# Altium PCB hardware_tutorial_aguo.PcbDoc
Units mm, origin at the board's own origin, x right, y up, seen from the top; angles counter-clockwise.
Board outline 60 x 60 mm, 2 copper layers (Top Layer, Bottom Layer); 30 components, 42 nets, 138 pads, 8 vias.
Unrouted connection lines stored in the file: 14.
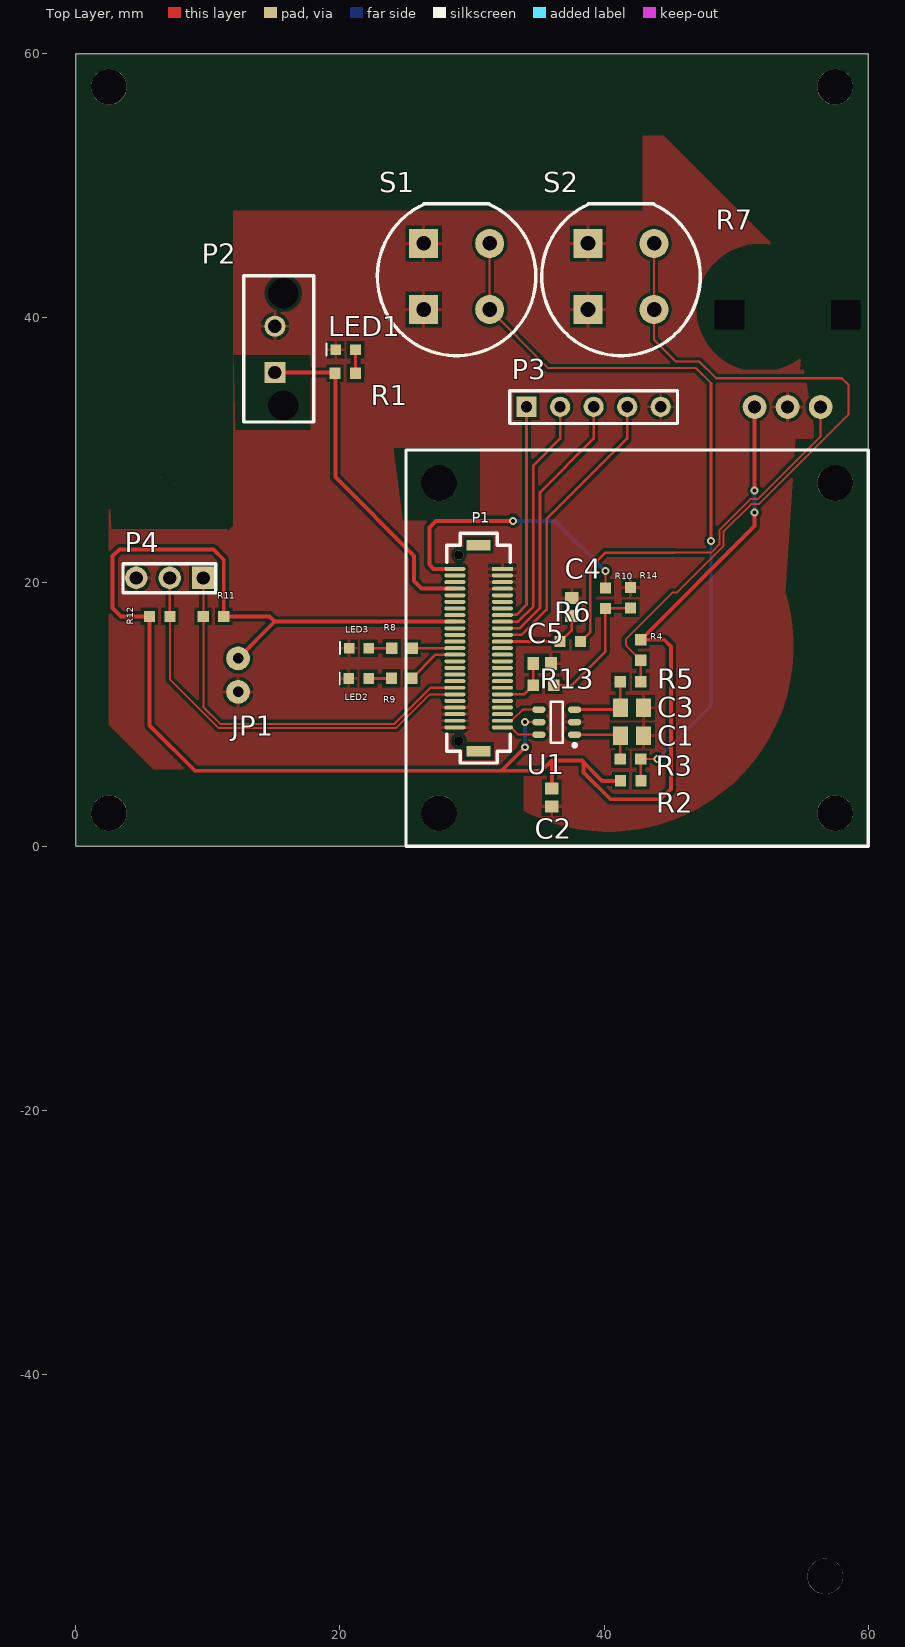
[diagram p0: Top Layer view]
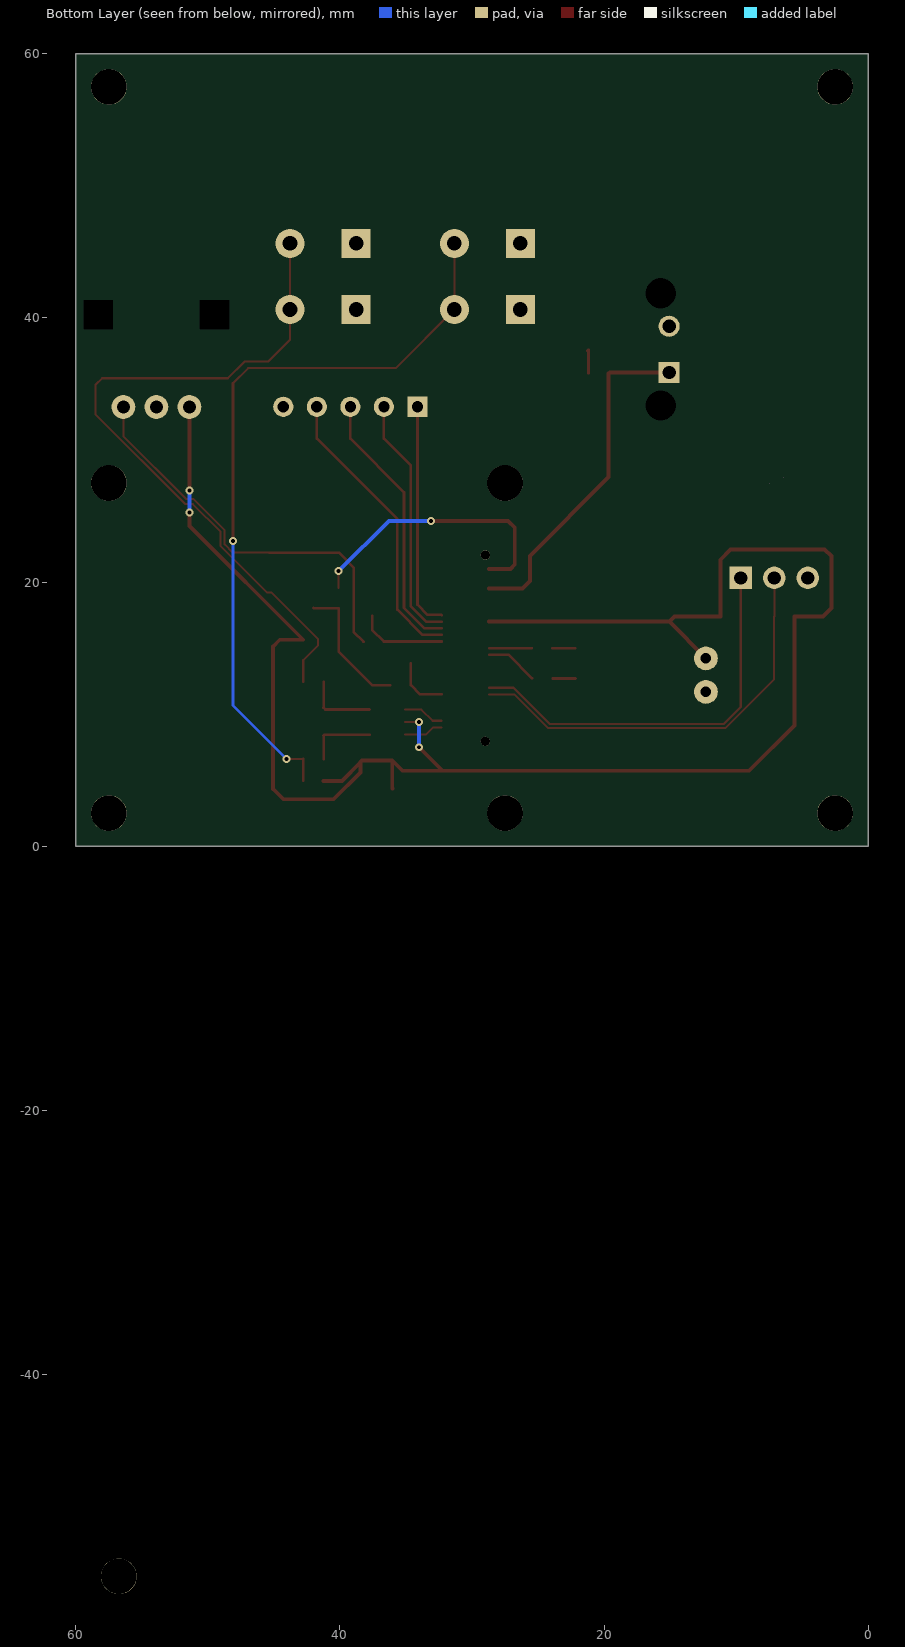
[diagram p1: Bottom Layer view, seen from below]
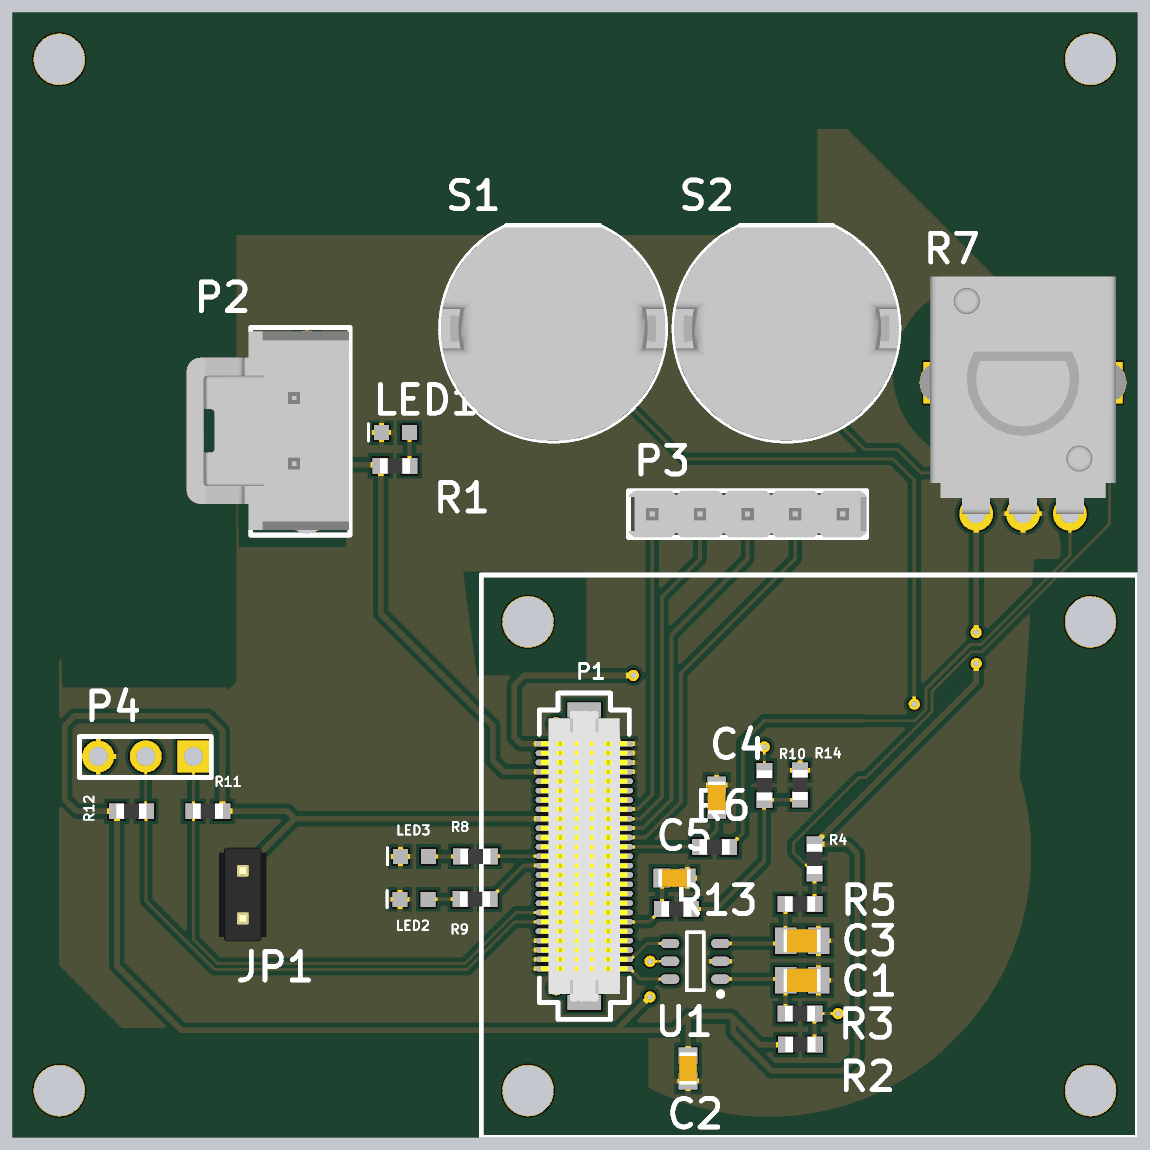
[diagram p2: 3D render of the assembled board from above, using the file's embedded part models]

## Layer stack, top to bottom
Top Solder: solder mask 0.0102, Solder Resist, Dk 3.5
Top Layer: signal copper 0.0356
Dielectric 1: dielectric 0.32, FR-4, Dk 4.8
Bottom Layer: signal copper 0.0356
Bottom Solder: solder mask 0.0102, Solder Resist, Dk 3.5

## Board outline
0,60 60,60 60,0 0,0
cut-out: 6.444,27.94
cut-out: 7.46,27.432
cut-out: 60.781,74.53

## Design rules (kind name [scope] priority, off if disabled: settings)
BoardOutlineClearance [All] p1: gap=0.406 ignorepadtopadclearanceinfootprint=FALSE
Clearance [All] p1: gap=0.254 ignorepadtopadclearanceinfootprint=FALSE except(0: Arc-Hole Track-Hole SMDPad-Hole THPad-Hole Via-Hole Fill-Hole Poly-Hole Region-Hole Text-Hole; 0.152: Arc-Arc Arc-Track Arc-SMDPad Track-Track Track-SMDPad SMDPad-SMDPad THPad-THPad)
ComponentClearance ComponentClearance_ControllerBoard [InComponent('P1') vs Identifier = 'Controller_Board'] p1: gap=0 collisioncheckmode=3 verticalgap=0 showdistances=FALSE
ComponentClearance ComponentClearance_Standoffs [Identifier = 'Standoff' vs Identifier = 'Controller_Board'] p2: gap=0 collisioncheckmode=3 verticalgap=0 showdistances=FALSE
ComponentClearance [All] p3: gap=0.254 collisioncheckmode=3 verticalgap=0.254 showdistances=FALSE
HoleSize [All] p1: absolutevalues=TRUE maxlimit=6.3 minlimit=0.3 maxpercent=80.000 minpercent=20.000
MinimumAnnularRing [All] p1: minimumring=0.152
MinimumSolderMaskSliver [All] p1: minsoldermaskwidth=0.3
PolygonConnect [IsPad] p1: connectstyle=Relief reliefconductorwidth=0.254 reliefentries=4 polygonreliefangle="90 Angle" airgapwidth=0.254
PolygonConnect PolygonConnect_NoThermal [Not(IsPad)] p2: connectstyle=Direct reliefconductorwidth=0.254 reliefentries=4 polygonreliefangle="90 Angle" airgapwidth=0.254
RoutingVias [All] p1: holewidth=0.3 width=0.6 viastyle="Through Hole" minholewidth=0.3 minwidth=0.6 maxholewidth=0.711 maxwidth=1.27
SilkToSolderMaskClearance [IsPad] p1: minsilkscreentomaskgap=0.178 clearancetoexposedcopper=TRUE
SolderMaskExpansion [All] p1: expansion=0.102
Width [All] p1: maxlimit=2.54 minlimit=0.154 preferedwidth=0.2
26 further rules are at their usual default settings.

## Components (designator, comment, footprint, x,y, rotation, side; value= is the part's Value field where it differs from the comment)
C1 "CAP CER 10uF 25V 10% X5R 0805" "CAP, 0805" 42.117,8.382 r0 top
C2 "CAP CER 0.1UF 50V 10% X7R 0603" "CAP, 0603" 36.035,3.683 r270 top
C3 "CAP CER 10uF 25V 10% X5R 0805" "CAP, 0805" 42.117,10.49 r0 top
C4 "CAP CER 4.7UF 25V 10% X5R 0603" "CAP, 0603" 37.559,18.121 r90 top
C5 "CAP CER 0.1UF 50V 10% X7R 0603" "CAP, 0603" 35.313,13.843 r0 top
JP1 "JUMPER" "CONN 2POS JUMPER 0.1\"" 12.286,14.224 r270 top
LED1 "LED GREEN CLEAR 2V 0603" LED_0603 21.127,37.602 r180 top
LED2 "LED YELLOW CLEAR 2.1V 0603" LED_0603 22.118,12.71 r180 top
LED3 "LED GREEN CLEAR 2V 0603" LED_0603 22.141,14.996 r180 top
P1 "CONN 50POS Bergstak Plug 0.02\"" "CONN, BERGSTAK 50 POS PLUG" 30.5,15 r0 top locked
P2 "CONN 2POS ULTRA-FIT 0.138\"" "CONN, 2POS ULTRA-FIT" 15.08,35.87 r90 top
P3 "5POS 0.1" "CONN, 5POS HEADR 0.1\"" 34.13,33.274 r0 top
P4 "CONN 3POS HEADR MALE 0.1\"" "CONN, 3POS 0.100\" Header, 1 ROW" 9.652,20.32 r180 top
R1 "RES 4.7K OHM 1% 1/10W 0603" "RES, 0603" 20.401,35.814 r0 top
R2 "RES 191K OHM 1% 1/10W 0603" "RES, 0603" 42.017,4.953 r0 top
R3 "RES 1.6K OHM 1% 1/10W 0603" "RES, 0603" 42.004,6.604 r180 top
R4 "RES 10K OHM 1% 1/10W 0603" "RES, 0603" 42.779,14.859 r270 top
R5 "RES 1.6K OHM 1% 1/10W 0603" "RES, 0603" 42.004,12.446 r180 top
R6 "1K" "RES, 0603" 37.445,15.494 r0 top
R7 "POT 10K OHM 1/20W CARBON LINEAR" "POT footprint (tutorial)" 53.897,33.259 r0 top
R8 "RES 100 OHM 1% 1/10W 0603" "RES, 0603" 24.694,14.996 r180 top
R9 "RES 100 OHM 1% 1/10W 0603" "RES, 0603" 24.671,12.71 r180 top
R10 "RES 10K OHM 1% 1/10W 0603" "RES, 0603" 40.099,18.783 r270 top
R11 "RES 10K OHM 1% 1/10W 0603" "RES, 0603" 10.427,17.399 r180 top
R12 "RES 10K OHM 1% 1/10W 0603" "RES, 0603" 6.35,17.399 r0 top
R13 "RES 10K OHM 1% 1/10W 0603" "RES, 0603" 35.413,12.192 r180 top
R14 "RES 3.3K OHM 1% 1/4W 0603" "RES, 0603" 42.004,18.809 r90 top
S1 "SPST" "SW SPST D6 SERIES GREEN" 26.336,45.64 r270 top
S2 "SPST" "SW SPST D6 SERIES YELLOW" 38.782,45.64 r270 top
U1 "IC INVERTER SCHMITT 2CH SC88" TSOP95P280X110-6N 36.416,9.398 r180 top

## Footprints (in the part's own frame and the unit in brackets; to place one, negate y for a bottom-side part, rotate by r counter-clockwise, add the part's x,y. Pads: shape width x height; smd on the part's side, far side on the other; paste and mask are expansions set on the pad)
"CAP, 0603" [mm] "Chip Capacitor, 2-Leads, Body 1.60x0.81mm, IPC Medium Density"
  rect 0.9x1 smd mask+0.076: 1(-0.675,0) 2(0.675,0)
  body extent -0.87,-0.48 0.87,0.48, height 0.9
"CAP, 0805" [mm] "Chip Capacitor, 2-Leads, Body 2.00x1.25mm, IPC Medium Density"
  rect 1.15x1.4 smd: 1(-0.875,0) 2(0.875,0)
  body extent -1,-0.63 1,0.63, height 1.25
"CONN 2POS JUMPER 0.1\"" [mm]
  round 1.8 hole 0.8: 1(0,0) 2(2.54,0)
  body extent -1.23,-1.27 3.77,1.27, height 7.1
"CONN, 2POS ULTRA-FIT" [mm] "2 Positions Header, Shrouded Connector 0.138\" (3.50mm) Through Hole Gold"
  rect 1.6x1.6 hole 1.02: 1(0,0)
  round 1.6 hole 1.02: 2(3.5,0)
  round 1.6 hole 2.3: ""(-2.5,-0.63) ""(6,-0.63)
  silkscreen extent -3.74,-2.93 7.33,2.37, body extent -3.48,-2.87 7.12,5.79, height 13.85
"CONN, 3POS 0.100\" Header, 1 ROW" [mm] "Connector, 3 position 0.1\" (2.54mm) Through Hole Generic Header"
  rect 1.7x1.7 hole 1: 1(0,0)
  round 1.7 hole 1: 2(2.54,0) 3(5.08,0)
  silkscreen extent -0.95,-1.06 6.08,1.12
"CONN, 5POS HEADR 0.1\"" [mil]
  rect 60x60 hole 33.46: 1(0,0)
  round 60 hole 33.46: 2(100,0) 3(200,0) 4(300,0) 5(400,0)
  silkscreen extent -50,-50 450,48, body extent -50,-50 450,48, height 335
"CONN, BERGSTAK 50 POS PLUG" [mm] "Bergstak 50 Position Plug"
  rect 1.6x0.3 smd: 1(1.8,6)
  oval 1.6x0.3 smd: 2(1.8,5.5) 3(1.8,5) 4(1.8,4.5) 5(1.8,4) 6(1.8,3.5) 7(1.8,3) 8(1.8,2.5) 9(1.8,2) 10(1.8,1.5) 11(1.8,1) 12(1.8,0.5) 13(1.8,0) 14(1.8,-0.5) 15(1.8,-1) 16(1.8,-1.5) 17(1.8,-2) 18(1.8,-2.5) 19(1.8,-3) 20(1.8,-3.5) 21(1.8,-4) 22(1.8,-4.5) 23(1.8,-5) 24(1.8,-5.5) 25(1.8,-6) 26(-1.8,-6) 27(-1.8,-5.5) 28(-1.8,-5) 29(-1.8,-4.5) 30(-1.8,-4) 31(-1.8,-3.5) 32(-1.8,-3) 33(-1.8,-2.5) 34(-1.8,-2) 35(-1.8,-1.5) 36(-1.8,-1) 37(-1.8,-0.5) 38(-1.8,0) 39(-1.8,0.5) 40(-1.8,1) 41(-1.8,1.5) 42(-1.8,2) 43(-1.8,2.5) 44(-1.8,3) 45(-1.8,3.5) 46(-1.8,4) 47(-1.8,4.5) 48(-1.8,5) 49(-1.8,5.5) 50(-1.8,6)
  round 0.7 hole 0.7: ""(-1.5,-7.05) ""(-1.5,7.05)
  rect 1.8x0.8 smd: ""(0,-7.8) ""(0,7.8)
  silkscreen extent -2.4,-8.7 2.4,8.7, body extent -2.3,-7.75 2.3,7.75, height 4.2
LED_0603 [mm]
  rect 0.8x0.8 smd: 1(-0.05,0.01) 2(1.45,0.01)
  silkscreen extent 2.13,-0.46 2.13,0.45, body extent -0.09,-0.39 1.51,0.41, height 0.8
"POT footprint (tutorial)" [mm] "ape"
  round 1.8 hole 1: 1(-2.5,0) 2(2.5,0) 3(0,0)
  rect 1.82x2.22 hole 2.2 square: 4(-4.4,7) 4(4.4,7) 4(4.4,7)
  body extent -5.7,0 5.7,12.65, height 14.5
"RES, 0603" [mm] "Chip Resistor, 2-Leads, Body 1.60x0.80mm, IPC Medium Density"
  rect 0.85x0.85 smd: 1(-0.775,0) 2(0.775,0)
  body extent -0.8,-0.4 0.8,0.4, height 0.55
"SW SPST D6 SERIES GREEN" [mm]
  rect 2.2x2.2 hole 1.1: 1(0,0) 1(5,0)
  round 2.2 hole 1.1: 2(0,5) 2(5,5)
  silkscreen extent -3,-3.5 8.5,8.5, body extent -2.9,-3.5 8.5,8.5, height 6.17
"SW SPST D6 SERIES YELLOW" [mm]
  rect 2.2x2.2 hole 1.1: 1(0,0) 1(5,0)
  round 2.2 hole 1.1: 2(0,5) 2(5,5)
  silkscreen extent -3,-3.5 8.5,8.5, body extent -2.9,-3.5 8.5,8.5, height 6.17
TSOP95P280X110-6N [mm] "TSOP, 6-Leads, Body 2.90x1.50mm, Pitch 0.95mm, IPC Medium Density"
  oval 1x0.5 smd: 1(-1.35,0.95) 2(-1.35,0) 3(-1.35,-0.95) 4(1.35,-0.95) 5(1.35,0) 6(1.35,0.95)
  silkscreen extent -1.48,-1.55 0.45,1.87, body extent -0.85,-1.55 0.85,1.55, height 1.1

## Part data
C1 C3: "10µF ±10% 25V Ceramic Capacitor X5R 0805 (2012 Metric)", Capacitance=10µF, Manufacturer="Murata Electronics North America", Manufacturer Part Number=GRM21BR61E106KA73L, Operating Temperature="-55°C ~ 85°C", Package / Case="0805 (2012 Metric)", Ratings=-, Supplier Part Number 1=490-5523-1-ND, Temperature Coefficient=X5R, Tolerance=±10%, Voltage - Rated=25V, Applications="General Purpose", Category=Capacitors, ComponentLink1Description=http://search.murata.co.jp/Ceramy/image/img/A01X/G101/ENG/GRM21BR61E106KA73-01.pdf, ComponentLink1URL=http://search.murata.co.jp/Ceramy/image/img/A01X/G101/ENG/GRM21BR61E106KA73-01.pdf, Features=-, Height - Seated (Max)=-, Lead Spacing=-, Lead Style=-, Mounting Type="Surface Mount, MLCC", Packaging="Cut Tape (CT)", Part Status=Active, Pricing 1="1=0.3, 10=0.214, 100=0.1008, 500=0.07068, 1000=0.05851 (CAD)", RoHS="RoHS Compliant", Size / Dimension="0.079\" L x 0.049\" W (2.00mm x 1.25mm)", Stock 1=1695157, Supplier 1=Digi-Key, Thickness (Max)="0.053\" (1.35mm)"
C2 C5: "0.10µF ±10% 50V Ceramic Capacitor X7R 0603 (1608 Metric)", Capacitance=0.1µF, Manufacturer 1="AVX Corporation", Manufacturer Part Number 1=06035C104KAT2A, Operating Temperature="-55°C ~ 125°C", Package / Case="0603 (1608 Metric)", Ratings=-, Supplier Part Number 1=478-5052-1-ND, Temperature Coefficient=X7R, Tolerance=±10%, Voltage=50V, ComponentLink1Description=http://datasheets.avx.com/X7RDielectric.pdf, ComponentLink1URL=http://datasheets.avx.com/X7RDielectric.pdf, Height - Seated (Max)=-, Lead Spacing=-, Lead Style=-, Mounting Type="Surface Mount, MLCC", Packaging="Cut Tape (CT)", Part Status=Active, Size / Dimension="0.063\" L x 0.032\" W (1.60mm x 0.81mm)", Supplier 1=Digi-Key, Thickness (Max)="0.035\" (0.90mm)"
C4: "4.7µF ±10% 25V Ceramic Capacitor X5R 0603 (1608 Metric)", Capacitance=4.7µF, Manufacturer 1="Murata Electronics North America", Manufacturer Part Number 1=GRM188R61E475KE11D, Operating Temperature="-55°C ~ 85°C", Package / Case="0603 (1608 Metric)", Ratings=-, Supplier Part Number 1=490-7203-1-ND, Temperature Coefficient=X5R, Tolerance=±10%, Voltage=25V, ComponentLink1Description=http://www.murata.com/~/media/webrenewal/support/library/catalog/products/capacitor/mlcc/c02e.ashx, ComponentLink1URL=http://www.murata.com/~/media/webrenewal/support/library/catalog/products/capacitor/mlcc/c02e.ashx, Height - Seated (Max)=-, Lead Spacing=-, Lead Style=-, Mounting Type="Surface Mount, MLCC", Packaging="Cut Tape (CT)", Part Status=Active, Size / Dimension="0.063\" L x 0.031\" W (1.60mm x 0.80mm)", Supplier 1=Digi-Key, Thickness (Max)="0.031\" (0.80mm)"
JP1: library part "CONN 2POS JUMPER 0.1\"", "2 Positions Header Connector Through Hole Gold", Current Rating=2A, Insulation Color=Black, Manufacturer="Omron Electronics Inc-EMC Div", Manufacturer Part Number=XG8T-0231, Material Flammability Rating="UL94 V-0", Operating Temperature="-55°C ~ 105°C", Supplier Part Number 1=XG8T-0231-ND, Voltage Rating=300V, Applications=-, Category="Connectors, Interconnects", ComponentLink1Description=http://www.omron.com/ecb/products/pdf/en-xj8.pdf, ComponentLink1URL=http://www.omron.com/ecb/products/pdf/en-xj8.pdf, Connector Type=Header, Contact Finish - Mating=Gold, Contact Finish - Post=Tin, Contact Finish Thickness - Mating="5.9µin (0.15µm)", Contact Finish Thickness - Post=-, Contact Length - Mating="0.169\" (4.30mm)", Contact Length - Post="0.118\" (3.00mm)", Contact Material="Brass, Nickel", Contact Shape=Square, Contact Type="Male Pin", Fastening Type=-, Features=-, Ingress Protection=-, Insulation Height="0.098\" (2.50mm)", Insulation Material="Polybutylene Terephthalate (PBT), Glass Filled", Mated Stacking Heights=-, Mounting Type="Through Hole", Number of Positions=2, Number of Positions Loaded=All, Number of Rows=2, Overall Contact Length="0.386\" (9.80mm)", Packaging=Bulk, Part Status=Active, Pitch - Mating=-, Pricing 1="1=0.28, 10=0.265, 100=0.183, 500=0.15484, 1000=0.12668, 5000=0.11261, 10000=0.10205 (CAD)", RoHS="RoHS Compliant", Row Spacing - Mating="0.100\"", Shrouding=Unshrouded, Stock 1=9094, Style="Board to Board or Cable", Supplier 1=Digi-Key, Termination=Solder, Type=JUMPER
LED1 LED3: "Green 572nm LED Indication - Discrete 2V 0603 (1608 Metric)", Color=Green, Current - Test=20mA, Lens Color=Colorless, Manufacturer="Wurth Electronics Inc.", Manufacturer Part Number=150060VS75000, Millicandela Rating=40mcd, Package / Case="0603 (1608 Metric)", Supplier Device Package=0603, Supplier Part Number 1=732-4980-1-ND, Voltage - Forward (Vf) (Typ)=2V, Category=Optoelectronics, ComponentLink1Description=http://katalog.we-online.de/led/datasheet/150060VS75000.pdf, ComponentLink1URL=http://katalog.we-online.de/led/datasheet/150060VS75000.pdf, Features=-, Height (Max)=0.80mm, Lens Style/Size="Rectangle with Flat Top, 1.10mm x 0.70mm", Lens Transparency=Clear, Mounting Type="Surface Mount", Packaging="Cut Tape (CT)", Part Status=Active, Pricing 1="1=0.21, 100=0.1617, 500=0.13964 (CAD)", RoHS="RoHS Compliant", Size / Dimension="1.60mm L x 0.80mm W", Stock 1=9408, Supplier 1=Digi-Key, Viewing Angle=140°, Wavelength - Dominant=570nm, Wavelength - Peak=572nm
LED2: "Yellow 590nm LED Indication - Discrete 2V 0603 (1608 Metric)", Color=Yellow, Current - Test=20mA, Lens Color=Colorless, Manufacturer="Wurth Electronics Inc.", Manufacturer Part Number=150060YS75000, Millicandela Rating=120mcd, Package / Case="0603 (1608 Metric)", Supplier Device Package=0603, Supplier Part Number 1=732-4981-1-ND, Voltage - Forward (Vf) (Typ)=2V, Category=Optoelectronics, ComponentLink1Description=http://katalog.we-online.de/led/datasheet/150060YS75000.pdf, ComponentLink1URL=http://katalog.we-online.de/led/datasheet/150060YS75000.pdf, Features=-, Height (Max)=0.80mm, Lens Style/Size="Rectangle with Flat Top, 1.10mm x 0.70mm", Lens Transparency=Clear, Mounting Type="Surface Mount", Packaging="Cut Tape (CT)", Part Status=Active, Pricing 1="1=0.21, 100=0.1617, 500=0.13964 (CAD)", RoHS="RoHS Compliant", Size / Dimension="1.60mm L x 0.80mm W", Stock 1=10523, Supplier 1=Digi-Key, Viewing Angle=140°, Wavelength - Dominant=590nm, Wavelength - Peak=595nm
P1: "50 Position Connector Plug, Outer Shroud Contacts Surface Mount Gold", Manufacturer 1="Amphenol FCI", Manufacturer Part Number 1=10132797-055100LF, Supplier Part Number 1=609-5226-1-ND, ComponentLink1Description=http://portal.fciconnect.com/Comergent//fci/drawing/10132797.pdf, ComponentLink1URL=http://portal.fciconnect.com/Comergent//fci/drawing/10132797.pdf, Connector Type="Plug, Outer Shroud Contacts", Contact Finish=Gold, Contact Finish Thickness="1µin (0.025µm)", Height Above Board="0.169\" (4.30mm)", Mated Stacking Heights=5mm, Mounting Type="Surface Mount", Number of Positions=50, Number of Rows=2, Packaging="Cut Tape (CT)", Part Status=Active, Pitch="0.020\" (0.50mm)", Series="BergStak Plug", Supplier 1=Digi-Key
P2: "Connector Header Through Hole 2 position 0.138\" (3.50mm)", Color=Black, Manufacturer=Molex, Manufacturer Part Number=1722871102, Supplier Part Number 1=WM11701-ND, ComponentLink1Description=http://www.molex.com/pdm_docs/sd/1722861302_sd.pdf, ComponentLink1URL=http://www.molex.com/pdm_docs/sd/1722861302_sd.pdf, Connector Type="Male Pin", Contact Plating=Tin, Fastening Type=Latch, Mount="Through Hole", Number of Positions=2, Number of Rows=1, Packaging=Tray, Pitch=0.138inch, Pricing 1="1 = 0.78000, 10 = 0.68800, 100 = 0.59380, 500 = 0.48582, 1000 = 0.43184, 5000 = 0.37786, 10000 = 0.35897 (USD)", RoHS=Yes, Series=UltraFit, Stock 1=2743, Supplier 1=Digi-Key, Termination=Solder
P3: library part "CONN 5POS HEADR MALE 0.1in", "5 Positions Header, Breakaway Connector 0.100\" (2.54mm) Through Hole Tin", Colour=Black, Contact Resistance=20mR, Manufacturer 1=Molex, Manufacturer Part Number 1=0022284050, Max Operating Temperature=75°C, Max Voltage Rating (AC)=250V, Min Operating Temperature=0°C, Supplier Part Number 1=WM50014-05-ND, ComponentLink1Description=https://datasheet.ciiva.com/6814/022284363-sd-6814049.pdf, ComponentLink1URL=https://datasheet.ciiva.com/6814/022284363-sd-6814049.pdf, ComponentLink2Description=https://datasheet.ciiva.com/14804/179390022284050-pcb-headers-14804361.pdf, ComponentLink2URL=https://datasheet.ciiva.com/14804/179390022284050-pcb-headers-14804361.pdf, ComponentLink3Description=https://datasheet.ciiva.com/15217/getdatasheetpartid-256138-15217709.pdf, ComponentLink3URL=https://datasheet.ciiva.com/15217/getdatasheetpartid-256138-15217709.pdf, Connector Type="Male Pin", Contact Material=Bronze,Brass, Contact Mating Length=0.24inch, Contact Plating=Nickel,Tin, Depth=2.49mm, Description 1="Conn Unshrouded Header HDR 5 POS 2.54mm Solder ST Thru-Hole KK® Bag", Gender=Male, Housing Colour=Black, Housing Material=Nylon, Length=12.7mm, Max Voltage Rating (DC)=250V, Mount="Through Hole", Number of Contacts=5, Number of Positions=5, Number of Rows=1, Orientation=Straight, Packaging=Bulk, Pitch=2.54mm, Pricing 1="1=0.22, 10=0.21, 25=0.1796, 50=0.157, 100=0.1459, 250=0.129, 500=0.1234 (USD)", Stock 1=3161, Supplier 1=Digi-Key, Termination=Solder
P4: "3 Positions Header Connector 0.100\" (2.54mm) Through Hole Gold", Current Rating=3A, Insulation Color=Black, Manufacturer 1="Wurth Electronics Inc.", Manufacturer Part Number 1=61300311121, Material Flammability Rating="UL94 V-0", Operating Temperature="-40°C ~ 125°C", Supplier Part Number 1=732-5316-ND, Voltage=250V, ComponentLink1Description=http://katalog.we-online.de/em/datasheet/6130xx11121.pdf, ComponentLink1URL=http://katalog.we-online.de/em/datasheet/6130xx11121.pdf, Connector Type=Header, Contact Finish - Mating=Gold, Contact Finish - Post=-, Contact Finish Thickness - Mating=-, Contact Finish Thickness - Post=-, Contact Length - Mating="0.236\" (6.00mm)", Contact Length - Post="0.118\" (3.00mm)", Contact Material="Copper Alloy", Contact Shape=Square, Contact Type="Male Pin", Fastening Type=-, Ingress Protection=-, Insulation Height="0.100\" (2.54mm)", Insulation Material="Polybutylene Terephthalate (PBT)", Mated Stacking Heights=-, Mounting Type="Through Hole", Number of Positions=3, Number of Positions Loaded=All, Number of Rows=1, Overall Contact Length="0.454\" (11.54mm)", Packaging=Bulk, Part Status=Active, Pitch - Mating="0.100\" (2.54mm)", Row Spacing - Mating=-, Shrouding=Unshrouded, Style="Board to Board or Cable", Supplier 1=Digi-Key, Termination=Solder
R1: "4.7k Ohm ±1% 0.1W, 1/10W Chip Resistor 0603 (1608 Metric) Moisture Resistant Thick Film", Manufacturer 1=Yageo, Manufacturer Part Number 1=RC0603FR-074K7L, Operating Temperature="-55°C ~ 155°C", Package / Case="0603 (1608 Metric)", Power (Watts)=1/10W, Resistance (Ohms)=4.7k, Supplier Device Package=0603, Supplier Part Number 1=311-4.70KHRCT-ND, Temperature Coefficient=±100ppm/°C, Tolerance=±1%, Category=Resistors, ComponentLink1Description=http://www.yageo.com/documents/recent/PYu-RC_Group_51_RoHS_L_7.pdf, ComponentLink1URL=http://www.yageo.com/documents/recent/PYu-RC_Group_51_RoHS_L_7.pdf, Composition="Thick Film", Description 1="RES SMD 4.7K OHM 1% 1/10W 0603", Failure Rate=-, Features="Moisture Resistant", Height - Seated (Max)="0.022\" (0.55mm)", Packaging="Cut Tape (CT)", Part Status=Active, Pricing 1="1=0.16, 10=0.022, 100=0.0089, 1000=0.00402, 2500=0.00349 (CAD)", RoHS="RoHS Compliant", Size / Dimension="0.063\" L x 0.031\" W (1.60mm x 0.80mm)", Stock 1=3487566, Supplier 1=Digi-Key
R2: "191k Ohm ±1% 0.1W, 1/10W Chip Resistor 0603 (1608 Metric) Moisture Resistant Thick Film", Manufacturer 1=Yageo, Manufacturer Part Number 1=RC0603FR-07191KL, Operating Temperature="-55°C ~ 155°C", Package / Case="0603 (1608 Metric)", Power=1/10W, Resistance=10k, Supplier Device Package=0603, Supplier Part Number 1=311-191KHRCT-ND, Temperature Coefficient=±100ppm/°C, Tolerance=±1%, ComponentLink1Description=http://www.yageo.com/documents/recent/PYu-RC_Group_51_RoHS_L_7.pdf, ComponentLink1URL=http://www.yageo.com/documents/recent/PYu-RC_Group_51_RoHS_L_7.pdf, Composition="Thick Film", Failure Rate=-, Height - Seated (Max)="0.022\" (0.55mm)", Packaging="Cut Tape (CT)", Part Status=Active, Size / Dimension="0.063\" L x 0.031\" W (1.60mm x 0.80mm)", Supplier 1=Digi-Key
R3 R5: "1.6 kOhms ±1% 0.1W, 1/10W Chip Resistor 0603 (1608 Metric) Moisture Resistant Thick Film", Case/Package=0603, Case Code (Metric)=1608, Manufacturer=Yageo, Manufacturer Part Number=RC0603FR-071K6L, Max Operating Temperature=155°C, Min Operating Temperature=-55°C, Power Rating=1/10W, Resistance=1.6k, Supplier Part Number 1=311-1.60KHRCT-ND, Temperature Coefficient=100ppm/°C, Tolerance=1%, Voltage Rating=50V, Working Voltage=75V, Case Code (Imperial)=0603, ComponentLink1Description=http://components.arrow.com/part/dataview/0323_00200779, ComponentLink1URL=http://components.arrow.com/part/dataview/0323_00200779, ComponentLink2Description=http://www.yageo.com.tw/exep/pages/download/literatures/PYu-R_INT-thick_7.pdf, ComponentLink2URL=http://www.yageo.com.tw/exep/pages/download/literatures/PYu-R_INT-thick_7.pdf, ComponentLink3Description=http://www.mouser.com/ds/2/447/RC0603-272842.pdf, ComponentLink3URL=http://www.mouser.com/ds/2/447/RC0603-272842.pdf, ComponentLink4Description=http://www.yageo.com/documents/recent/PYu-RC0603_51_RoHS_L_v5.pdf, ComponentLink4URL=http://www.yageo.com/documents/recent/PYu-RC0603_51_RoHS_L_v5.pdf, Composition="Thick Film", Depth=0.8mm, Lead Free="Lead Free", Length=1.6mm, Military Standard=Not, Number of Terminations=2, Packaging="Tape and Reel", Pricing 1="1=0.1, 10=0.015, 100=0.006, 1000=0.0027, 2500=0.0023 (USD)", Stock 1=189550, Supplier 1=Digi-Key, Termination=SMD/SMT, Voltage Rating (DC)=50V
R4 R10 R11 R12 R13: "RES SMD 10K OHM 1% 1/10W 0603", Manufacturer 1=Yageo, Manufacturer Part Number 1=RC0603FR-0710KL, Operating Temperature="-55°C ~ 155°C", Package / Case="0603 (1608 Metric)", Power=1/10W, Resistance=10k, Supplier Device Package=0603, Supplier Part Number 1=311-10.0KHRCT-ND, Temperature Coefficient=±100ppm/°C, Tolerance=±1%, ComponentLink1Description=http://www.yageo.com/documents/recent/PYu-RC_Group_51_RoHS_L_7.pdf, ComponentLink1URL=http://www.yageo.com/documents/recent/PYu-RC_Group_51_RoHS_L_7.pdf, Composition="Thick Film", Failure Rate=-, Height - Seated (Max)="0.022\" (0.55mm)", Packaging="Cut Tape (CT)", Part Status=Active, Size / Dimension="0.063\" L x 0.031\" W (1.60mm x 0.80mm)", Supplier 1=Digi-Key
R6: library part "RES 1K OHM 5% 1/10W 0603", "1k Ohm ±5% 0.1W, 1/10W Chip Resistor 0603 (1608 Metric)", Manufacturer=Yageo, Manufacturer Part Number=RC0603JR-071KL, Operating Temperature="-55°C ~ 155°C", Package / Case="0603 (1608 Metric)", Power (Watts)="0.1W, 1/10W", Resistance (Ohms)=1k, Supplier Device Package=0603, Supplier Part Number 1=311-1.0KGRCT-ND, Temperature Coefficient=±100ppm/°C, Tolerance=±5%, Category=Resistors, ComponentLink1Description=http://www.yageo.com/documents/recent/PYu-RC_Group_51_RoHS_L_7.pdf, ComponentLink1URL=http://www.yageo.com/documents/recent/PYu-RC_Group_51_RoHS_L_7.pdf, Composition="Thick Film", Failure Rate=-, Features="Moisture Resistant", Height - Seated (Max)="0.022\" (0.55mm)", Packaging="Cut Tape (CT)", Part Status=Active, Pricing 1="1=0.15, 10=0.017, 100=0.0071, 1000=0.0032, 2500=0.00278 (CAD)", RoHS="RoHS Compliant", Size / Dimension="0.063\" L x 0.031\" W (1.60mm x 0.80mm)", Stock 1=4415240, Supplier 1=Digi-Key
R7: Manufacturer Part Number 1=PTV09A-4015F-B103, Supplier Part Number 1=PTV09A-4015F-B103-ND, Supplier 1=Digi-Key
R8 R9: "100 Ohm ±1% 0.1W, 1/10W Chip Resistor 0603 (1608 Metric) Moisture Resistant Thick Film", Manufacturer 1=Yageo, Manufacturer Part Number 1=RC0603FR-07100RL, Operating Temperature="-55°C ~ 155°C", Package / Case="0603 (1608 Metric)", Power=1/10W, Resistance=100, Supplier Device Package=0603, Supplier Part Number 1=311-100HRCT-ND, Temperature Coefficient=±100ppm/°C, Tolerance=±1%, ComponentLink1Description=http://www.yageo.com/documents/recent/PYu-RC_Group_51_RoHS_L_7.pdf, ComponentLink1URL=http://www.yageo.com/documents/recent/PYu-RC_Group_51_RoHS_L_7.pdf, Composition="Thick Film", Failure Rate=-, Height - Seated (Max)="0.022\" (0.55mm)", Packaging="Cut Tape (CT)", Part Status=Active, Size / Dimension="0.063\" L x 0.031\" W (1.60mm x 0.80mm)", Supplier 1=Digi-Key
R14: "3.3k Ohm ±1% 0.25W, 1/4W Chip Resistor 0603 (1608 Metric) Automotive AEC-Q200, Pulse Withstanding Thick Film", Manufacturer 1="Panasonic Electronic Components", Manufacturer Part Number 1=ERJ-PA3F3301V, Operating Temperature="-55°C ~ 155°C", Package / Case="0603 (1608 Metric)", Power=1/4W, Resistance=3.3k, Supplier Device Package=0603, Supplier Part Number 1=P3.3KBYCT-ND, Temperature Coefficient=±100ppm/°C, Tolerance=±1%, ComponentLink1Description=https://industrial.panasonic.com/cdbs/www-data/pdf/RDO0000/AOA0000C291.pdf, ComponentLink1URL=https://industrial.panasonic.com/cdbs/www-data/pdf/RDO0000/AOA0000C291.pdf, Composition="Thick Film", Failure Rate=-, Height - Seated (Max)="0.022\" (0.55mm)", Packaging="Cut Tape (CT)", Part Status=Active, Size / Dimension="0.063\" L x 0.031\" W (1.60mm x 0.80mm)", Supplier 1=Digi-Key
S1: library part "SW SPST-NO 0.1A 32V D6 Series Green", "Pushbutton Switch SPST-NO Keyswitch Through Hole D6 Series Green", Color - Actuator/Cap=Green, Current Rating="100mA (DC)", Illumination Type, Color=-, Manufacturer=C&K, Manufacturer Part Number="D6R50 F1 LFS", Operating Temperature="-20°C ~ 85°C", Supplier Part Number 1=401-1976-ND, Voltage Rating - DC=32V, Actuator Type="Round, Button", Category=Switches, Circuit=SPST-NO, ComponentLink1Description=http://www.ckswitches.com/media/1341/d6.pdf, ComponentLink1URL=http://www.ckswitches.com/media/1341/d6.pdf, Electrical Life="250,000 Cycles", Features="Tactile Feedback", Illumination Voltage (Nominal)=-, Ingress Protection=-, Mechanical Life=-, Mounting Type="Through Hole", Packaging=Bulk, Panel Cutout Dimensions=-, Part Status=Active, Pricing 1="1=1.73, 10=1.607, 25=1.5308, 50=1.454, 100=1.4158, 250=1.37756, 500=1.30102, 1000=1.22448, 5000=1.03316 (CAD)", RoHS="RoHS Compliant", Stock 1=3742, Supplier 1=Digi-Key, Switch Function=Off-Mom, Termination Style="PC Pin", Type=Keyswitch, Voltage Rating - AC=-
S2: library part "SW SPST-NO 0.1A 32V D6 Series Yellow", "Pushbutton Switch SPST-NO Keyswitch Through Hole D6 Series Yellow", Color - Actuator/Cap=Yellow, Current Rating="100mA (DC)", Illumination Type, Color=-, Manufacturer=C&K, Manufacturer Part Number="D6R30 F1 LFS", Operating Temperature="-20°C ~ 85°C", Supplier Part Number 1=401-1974-ND, Voltage Rating - DC=32V, Actuator Type="Round, Button", Category=Switches, Circuit=SPST-NO, ComponentLink1Description=http://www.ckswitches.com/media/1341/d6.pdf, ComponentLink1URL=http://www.ckswitches.com/media/1341/d6.pdf, Electrical Life="250,000 Cycles", Features="Tactile Feedback", Illumination Voltage (Nominal)=-, Ingress Protection=-, Mechanical Life=-, Mounting Type="Through Hole", Packaging=Bulk, Panel Cutout Dimensions=-, Part Status=Active, Pricing 1="1=1.73, 10=1.607, 25=1.5308, 50=1.454, 100=1.4158, 250=1.37756, 500=1.30102, 1000=1.22448, 5000=1.03316 (CAD)", RoHS="RoHS Compliant", Stock 1=2814, Supplier 1=Digi-Key, Switch Function=Off-Mom, Termination Style="PC Pin", Type=Keyswitch, Voltage Rating - AC=-
U1: "Inverter IC 2 Channel Schmitt Trigger SC-88", Digi-Key Part Number 1=1727-2072-1-ND, Manufacturer 1="Nexperia USA Inc.", Manufacturer Part Number 1=74LVC2G14GW-Q100H, Supplier 1=Digi-Key, Supplier Part Number 1=1727-2072-1-ND

## Free pads (board coordinates)
  round 2.7 hole 2.7: ""(2.5,2.5) ""(2.5,57.5) ""(27.5,2.5) ""(27.5,27.5) ""(56.738,-55.285) ""(57.5,57.5) ""(57.5,2.5) ""(57.5,27.5)

## Via types
v1: diameter 0.6, hole 0.3, Top Layer to Bottom Layer, 8 vias

## Nets (pads, with @x,y where several pads share a name; then routed paths per layer and width w, separated by ;. In a path a pad name is that pad's centre, name@x,y a point inside that pad or via, vN(x,y) a via of type N, cw(c..) or ccw(c..) an arc to the next point about the centre after c; other vN are vias at no path point)
3V3: C2.1 JP1.1 P1.40 P1.41 P1.42 P1.43 P1.44 P1.45 R2.1 R4.1 R7.1 R11.1 R12.1 U1.5 | length 138.9
  Top Layer w0.154: v1(34.003,9.398) U1.5
  Top Layer w0.3: JP1.1 15.062,17 ; P1.42 15.062,17 ; v1(34.003,7.493) 32.225,5.715 ; C2.1 36.04,4.363 36.04,6.477 ; R2.1 39.855,4.953 38.448,6.36 ; v1(51.397,26.929) R7.1 ; v1@51.402,25.4 v1(51.402,25.273) 51.402,24.257 R4.1 44.557,15.634 45.052,15.139 45.052,4.318 44.29,3.556 40.48,3.556 38.448,5.588 38.448,6.36 ; 15.062,17 14.663,17.399 R11.1 11.202,21.691 10.414,22.479 3.302,22.479 2.794,21.971 2.794,18.034 3.429,17.399 R12.1 5.575,9.157 9.017,5.715 32.225,5.715 ; 32.225,5.715 35.278,5.715 36.04,6.477 ; 36.04,6.477 38.331,6.477 38.448,6.36
  Bottom Layer w0.154: v1(51.397,26.929) v1@51.399,26.927 ; v1@51.399,25.276 v1(51.402,25.273)
  Bottom Layer w0.3: v1(34.003,7.493) v1(34.003,9.398) ; v1@51.399,25.276 v1@51.399,26.927
GND: C1.2 C2.2 C3.2 C4.2 C5.2 JP1.2 LED1.2 LED2.2 LED3.2 P1.1 P1.2 P1.3 P1.4 P1.26 P1.27 P1.28 P1.29 P2.2 P3.5 P4.3 R7.3 R14.2 S1.1 S2.1 U1.2
NetLED1_1: LED1.1 R1.2 | length 1.9
  Top Layer w0.2: R1.2 21.177,35.815 LED1.1 LED1.1@21.254,37.515
NetLED2_1: LED2.1 R9.2 | length 1.7
  Top Layer w0.2: LED2.1 23.886,12.7 R9.2
NetLED3_1: LED3.1 R8.2 | length 1.7
  Top Layer w0.2: LED3.1 23.909,14.986 R8.2
NetR2_2: R2.2 R3.1 S1.2 | length 57.1
  Top Layer w0.154: S1.2@31.336,45.64 31.336,40.64 35.781,36.195 46.957,36.195 48.1,35.052 ; R3.1 v1(44.036,6.604)
  Top Layer w0.2: R3.1 42.779,4.966 R2.2 ; v1(48.1,23.114) 48.1,35.052
  Bottom Layer w0.2: v1(44.036,6.604) 48.1,10.668 v1(48.1,23.114)
NetR4_2: R4.2 R5.1 S2.2 | length 53.9
  Top Layer w0.154: R4.2 41.651,15.212 41.651,15.68 45.174,19.203 45.514,19.203 49.037,22.726 49.037,23.8 51.141,25.904 51.697,25.904 58.514,32.721 58.514,34.925 58.006,35.433 48.481,35.433 47.211,36.703 45.433,36.703 43.782,38.354 43.782,40.64 S2.2@43.782,45.64
  Top Layer w0.2: R5.1 R4.2
NetR6_2: R6.2 R7.2 | length 30.3
  Top Layer w0.154: 45.363,22.225 48.103,22.225 48.731,22.853 48.731,23.927 51.102,26.298 51.658,26.298 56.397,31.037 R7.2
  Top Layer w0.2: R6.2 38.956,16.23 38.956,21.092 40.089,22.225 45.363,22.225
NetR10_2: R10.2 R13.1 R14.1 | length 10.2
  Top Layer w0.2: R13.1 37.559,12.192 40.099,14.732 R10.2 41.978,18.008 R14.1
PA0_BUTTON1_IN: P1.25 U1.6 | length 3
  Top Layer w0.154: P1.25 32.95,9 33.502,8.448 U1.6
PA1_BUTTON2_IN: P1.24 U1.4 | length 3.1
  Top Layer w0.154: P1.24 32.986,9.5 33.834,10.348 U1.4
PA1_POT: C4.1 P1.12 R6.1 | length 6.7
  Top Layer w0.2: P1.12 36.676,15.5 37.559,16.383 C4.1
PA2/AN2/USART2_TX: P1.23
PA3/AN3/USART2_RX: P1.22
PA4/AN4/SPI1_NSS: P1.21
PA6/AN6/SPI1_MISO: P1.19
PA7/AN7/SPI1_MOSI: P1.18
PA8: P1.7
PA9: P1.6
PA9_12V_MONITOR: C5.1 P1.20 R13.2 | length 4.3
  Top Layer w0.2: P1.20 33.946,11.5 R13.2 C5.1
PA10: P1.5
PA15/LED_RED: P1.39
PB0/AN8: P1.17
PB1/AN9: P1.16
PB2: P1.15
PB3/LED_GREEN: P1.38 R8.1 | length 3.2
  Top Layer w0.2: R8.1 25.473,15 P1.38
PB4/LED_BLUE: P1.37 R9.1 | length 4
  Top Layer w0.2: R9.1 27.236,14.5 P1.37
PB5/LED_BLUE: P1.36
PB6/USART1_TX: P1.34
PB7/USART1_RX: P1.33
PB8/I2C1_SCL: P1.32 P4.1 R11.2 | length 30.5
  Top Layer w0.154: P4.1 R11.2 9.652,10.541 10.922,9.271 24.13,9.271 26.859,12 P1.32
PB9/I2C1_SDA: P1.31 P4.2 R12.2 | length 31.8
  Top Layer w0.154: P4.2 7.112,17.412 R12.2 7.125,12.635 10.795,8.965 24.257,8.965 26.792,11.5 P1.31
PB10/USART3_TX/I2C2_SCL: P1.14
PB11/USART3_RX/I2C2_SDA: P1.13
PB12/SPI2_NSS: P1.11 P3.4 | length 22
  Top Layer w0.2: P1.11 33.747,16 35.654,17.907 35.654,24.765 41.75,30.861 P3.4
PB13/SPI2_SCK: P1.10 P3.3 | length 20.4
  Top Layer w0.2: P1.10 33.612,16.5 35.146,18.034 35.146,26.797 39.21,30.861 P3.3
PB14/SPI2_MISO: P1.9 P3.2 | length 18.8
  Top Layer w0.2: P1.9 33.477,17 34.638,18.161 34.638,28.829 36.67,30.861 P3.2
PB15/SPI2_MOSI: P1.8 P3.1 | length 17.1
  Top Layer w0.2: P1.8 32.319,17.519 33.361,17.519 34.13,18.288 P3.1
PC13: P1.30
"Schmit 1": C1.1 R3.2 U1.1 | length 5.3
  Top Layer w0.2: U1.1 41.176,8.448 C1.1 41.229,8.369 R3.2
"Schmit 3": C3.1 R5.2 U1.3 | length 5.5
  Top Layer w0.2: U1.3 41.1,10.348 C3.1 41.229,10.503 R5.2
VBAT: P1.47 P1.48 P1.49 P1.50 P2.1 R1.1 R10.1 | length 47.4
  Top Layer w0.154: R10.1 v1(40.099,20.828)
  Top Layer w0.3: P2.1 19.57,35.87 R1.1 19.652,35.788 19.652,27.94 25.621,21.971 25.621,20.066 26.187,19.5 P1.47 ; P1.50 27.1,21 26.764,21.336 26.764,24.13 27.272,24.638 v1(33.114,24.638)
  Bottom Layer w0.3: v1(33.114,24.638) 36.289,24.638 v1(40.099,20.828)
pads on no net: P1. P1.35 P1.46 P2. R7.4

## Polygon pours and split planes (outlines as drawn)
no net on Top Layer (solid, pour order 18): 28.956,25.527
GND on Top Layer (solid, pour order 8): 54.483,30.861 55.887,30.861 55.887,31.75 55.125,36.068 54.829,36.068 54.891,36.998 cw(c51.821,40.765) 53.068,36.068 50.573,36.068 cw(c51.821,40.765) 46.961,40.765 cw(c51.821,40.765) 51.821,45.624 cw(c51.821,40.765) 52.775,45.529 44.52,53.785 5.404,53.785 5.404,42.227 5.214,42.418 2.483,39.688 2.483,9.207 5.849,5.842 33.916,5.842 33.916,2.667 ccw(c40.329,15.113) 40.329,1.112 ccw(c40.329,15.113) 54.33,15.113 ccw(c40.329,15.113) 53.71,19.234
no net on Top Layer (solid, pour order 4): 18.415,23.622
no net on Top Layer (solid, pour order 2): 10.414,35.433

## Other copper
Top Layer:
  pour cut-out: 10.795,55.602 10.795,48.133 42.926,48.133 42.926,55.372 42.545,55.753
  pour cut-out: 1.524,54.102 1.651,54.229 11.938,54.229 11.938,24.257 11.557,23.876 11.43,24.003 2.667,24.003
  pour cut-out: 13.589,30.988
  pour cut-out: 26.035,35.179
  pour cut-out: 11.938,37.211 17.653,37.211 17.78,37.084 17.78,31.496 12.065,31.496
  pour cut-out: 24.036,30.178 30.607,30.178 30.607,25.146 29.718,24.257 29.337,24.638 24.765,24.638

## Silkscreen, mask and mechanical layers (free items; w line width, h text height)
Top Overlay:
  lines w0.254: 25,0 60,0 60,30 25,30 25,0
Mechanical 1:
  lines w1.2: 25,0 60,0 60,30 25,30 25,0